# EAGLE board ESP12 (EAGLE 9.6.2)
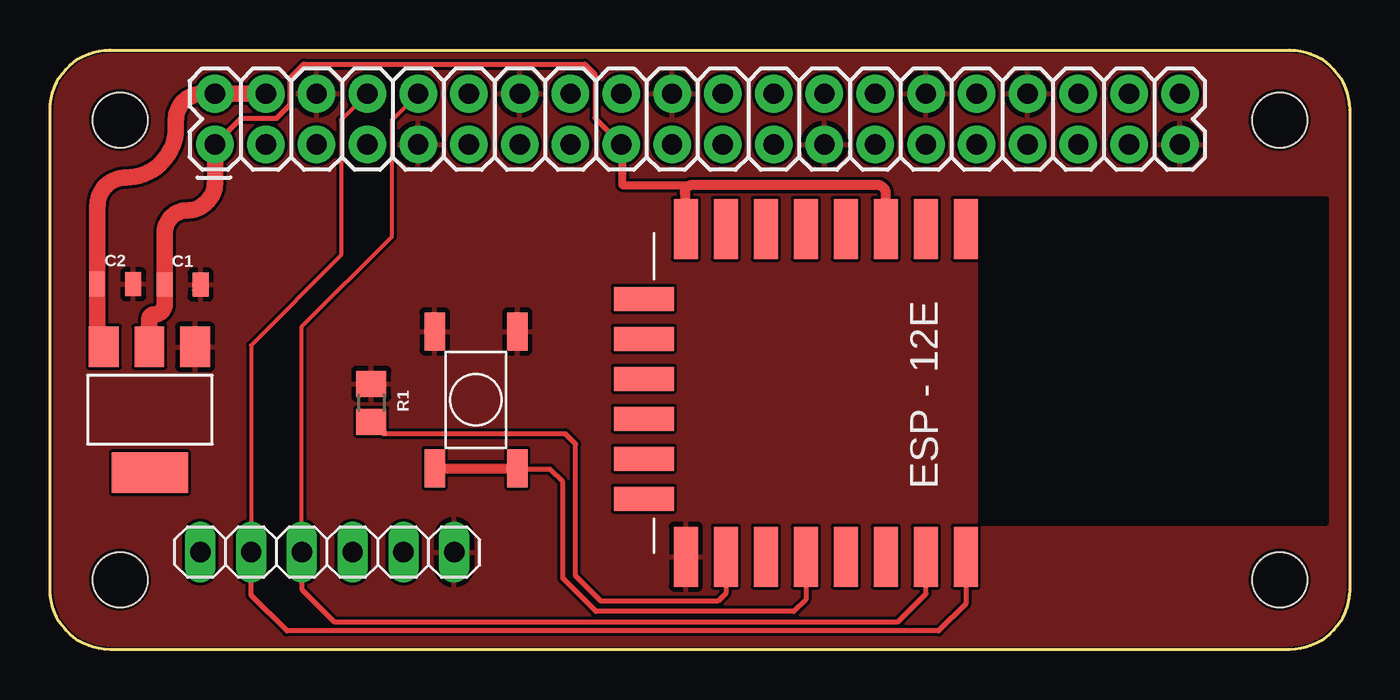
[diagram p0: board, top side]
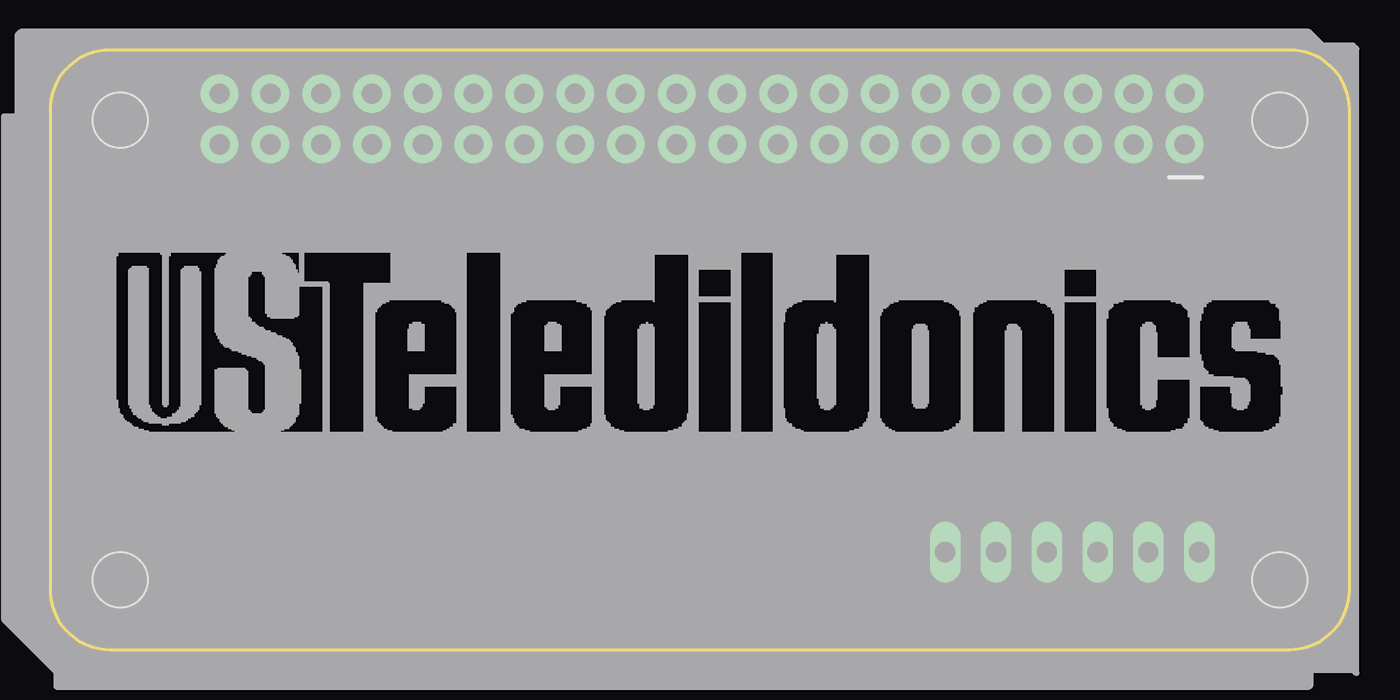
[diagram p1: board, bottom side, seen from below]

Size 65 x 30 mm. Coordinates in mm from the lower left corner, seen from the top.
Outline: 0,27 0,3 arc90 3,0 62,0 arc90 65,3 65,27 arc90 62,30 3,30 arc90 0,27
Copper layers (1*16): Top 0.035mm / dielectric 1.5mm / Bottom 0.035mm
Design rules "default *": minimum track width 6mil, minimum drill 0.35mm, track to track 6mil, track to pad 6mil, pad to pad 6mil, via to via 6mil, smd to smd 6mil, copper to edge 6mil, drill to drill 6mil, minimum pad ring 10mil, minimum via ring 8mil, stop-mask expansion 4mil, vias tented up to drill 0mil, thermal gap 10mil
Holes 2.75 mm at 3.5,3.5 3.5,26.5 61.5,3.5 61.5,26.5
tKeepout: area 46.6,6.3 to 63.8,22.5
bKeepout: area 46.6,6.3 to 63.8,22.5
tRestrict: area 46.6,6.3 to 63.8,22.5
bRestrict: area 46.6,6.3 to 63.8,22.4
Milling: 8 lines

## Footprints (pad centres in the part's own frame; a part is rotated, then mirrored left to right if it is on the bottom)
0805 = smd 0.8 x 1.2: 1 -0.9,0; 2 0.9,0
SWITCHMOMENTARY = smd 1.905 x 1.016: L1 -3.427,2.054; L2 -3.427,-2.081; R1 3.427,2.054; R2 3.427,-2.081
SOT223 = smd 1.499 x 2.007: 1 -2.261,-3.15; 2 0.025,-3.15; 3 2.311,-3.15 | smd 3.81 x 2.007: 4 0,3.15
2X20 = drill 1.016 pad 1.88: 1 0,0; 2 0,2.54; 3 2.54,0; 4 2.54,2.54; 5 5.08,0; 6 5.08,2.54; 7 7.62,0; 8 7.62,2.54; 9 10.16,0; 10 10.16,2.54; 11 12.7,0; 12 12.7,2.54; 13 15.24,0; 14 15.24,2.54; 15 17.78,0; 16 17.78,2.54; 17 20.32,0; 18 20.32,2.54; 19 22.86,0; 20 22.86,2.54; 21 25.4,0; 22 25.4,2.54; 23 27.94,0; 24 27.94,2.54; 25 30.48,0; 26 30.48,2.54; 27 33.02,0; 28 33.02,2.54; 29 35.56,0; 30 35.56,2.54; 31 38.1,0; 32 38.1,2.54; 33 40.64,0; 34 40.64,2.54; 35 43.18,0; 36 43.18,2.54; 37 45.72,0; 38 45.72,2.54; 39 48.26,0; 40 48.26,2.54
1X06 = drill 1.016 long: 1 -6.35,0; 2 -3.81,0; 3 -1.27,0; 4 1.27,0; 5 3.81,0; 6 6.35,0
R0805 = smd 1.3 x 1.5: 1 -0.95,0; 2 0.95,0
ESP12E-SMD = smd 3 x 1.2: ADC -8.3,3.8; CH_PD -8.3,1.8; GND 8.1,-8.2; GPIO0 8.1,-2.2; GPIO2 8.1,-4.2; GPIO4 8.1,-0.2; GPIO5 8.1,1.8; GPIO12 -8.3,-4.2; GPIO13 -8.3,-6.2; GPIO14 -8.3,-2.2; GPIO15 8.1,-6.2; GPIO16 -8.3,-0.2; RESET -8.3,5.8; RXD0 8.1,3.8; TXD0 8.1,5.8; VCC -8.3,-8.2 | smd 1.2 x 3: CS0 -4.8,-10.3; GPIO9 -0.8,-10.3; GPIO10 1.2,-10.3; MISO -2.8,-10.3; MOSI 3.2,-10.3; SCLK 5.2,-10.3

## Placement (x,y rotation side)
C1  10uF  [0805]  6.63,18.25 0 top
C2  10uF  [0805]  3.27,18.28 0 top
FLASH  MOMENTARYSW  [SWITCHMOMENTARY]  21.3,12.49 90 top
IC1  REG1117  [SOT223]  5,12 180 top
J1  RASPBERRYPI-40-PIN-GPIO_PTH_NO_SHROUD  [2X20]  8.26,25.27 0 top
JP2  [1X06]  13.87,4.87 180 top
R1  10k  [R0805]  16.07,12.35 270 top
U3  [ESP12E-SMD]  40,12.75 270 top

## Library data of the parts
C1 C2 = SparkFun-Capacitors; PROD_ID: CAP-11330
FLASH = MRRobotBadge
IC1 = burr-brown; MPN: REG1117; OC_FARNELL: 1097566; OC_NEWARK: 14P6981
J1 = SparkFun-Connectors
JP2 = pinhead
R1 = rcl; SPICEPREFIX: R
U3 = esp8266modules

## Nets
3V3: JP2.3
5V: C2.1 IC1.3 J1.2 J1.4
CTS: JP2.2
FTDI_RX: J1.8 JP2.5 U3.TXD0
FTDI_TX: J1.10 JP2.4 U3.RXD0
GND: C1.2 C2.2 FLASH.R1 FLASH.R2 IC1.1 J1.6 J1.9 J1.14 J1.20 J1.25 J1.30 J1.34 J1.39 JP2.1 R1.1 U3.GND
N$1: R1.2 U3.GPIO15
N$2: FLASH.L1 FLASH.L2 U3.GPIO0
RTS: JP2.6
VCC: C1.1 IC1.2 J1.1 J1.17 U3.CH_PD U3.VCC

## Tracks (layer width: path | path; a pad name or v marks a point on that pad's centre or on a via)
5V
  Top 0.813: J1.4 J1.2 | J1.2 7.62,27.81 | IC1.3 arc-90 2.37,15.47 C2.1 2.37,22.18 arc-90 3.81,23.62 arc90 6.3,26.11 6.3,26.49 arc-90 7.62,27.81 | J1.2 7.62,27.81
FTDI_RX
  Top 0.203: J1.8 14.56,26.5 14.56,19.73 10.06,15.22 JP2.5
  Top 0.254: U3.TXD0 45.8,2.29 44.45,0.93 11.85,0.93 10.06,2.73 JP2.5
FTDI_TX
  Top 0.203: JP2.4 12.6,16.15 17.1,20.66 17.1,26.5 J1.10
  Top 0.254: JP2.4 12.6,3.02 14.22,1.4 42.42,1.4 43.81,2.79 43.81,4.63 U3.RXD0
GND
  Top 0.305: 7.26,17.98 C1.2 | C2.2 4.15,18.3
  pour Top: 0,16.09 0,27.09 arc-90 2.96,30.05 62.14,30.05 arc-90 65.02,27.18 65.02,3.13 arc-90 61.89,0 2.96,0 arc-90 0,2.96
N$1
  Top 0.254: U3.GPIO15 33.8,2.81 33.4,2.41 27.56,2.41 26.29,3.68 26.29,10.29 25.78,10.79 16.68,10.79 R1.2
N$2
  Top 0.254: U3.GPIO0 37.8,2.49 37.21,1.91 27.3,1.91 25.65,3.56 25.65,8.38 25.02,9.02 23.63,9.02 23.38,8.76
  Top 0.508: FLASH.L2 23.38,8.76 arc90 23.07,9.07 FLASH.L1
VCC
  Top 0.254: J1.1 9.56,26.58 11.34,26.58 12.01,27.25 12.01,28.61 12.7,29.29 26.75,29.29 27.26,28.78 27.26,26.59 J1.17
  Top 0.406: 32.13,23.24 28.61,23.24 28.61,25.23 J1.17
  Top 0.508: U3.CH_PD 41.8,22.84 arc90 41.4,23.24 32.13,23.24 arc90 31.75,22.86 31.75,21.1 arc90 U3.VCC
  Top 0.813: IC1.2 4.97,16.53 arc-90 5.21,16.76 arc90 5.74,17.29 C1.1 5.74,20.85 arc-90 6.86,21.97 arc90 8.26,23.37 J1.1
  Bottom 0.508: J1.1 8.26,25.02